# Altium PCB 330 下灯位.PcbDoc (part 2 of 5)
Units mm, origin at the board's own origin, x right, y up, seen from the top; angles counter-clockwise.
Board outline 301.8 x 92.3 mm, 2 copper layers (Top, Bottom), stack 0.323 mm thick; 298 components, 203 nets, 2190 pads, 758 vias.
Unrouted connection lines stored in the file: 36.
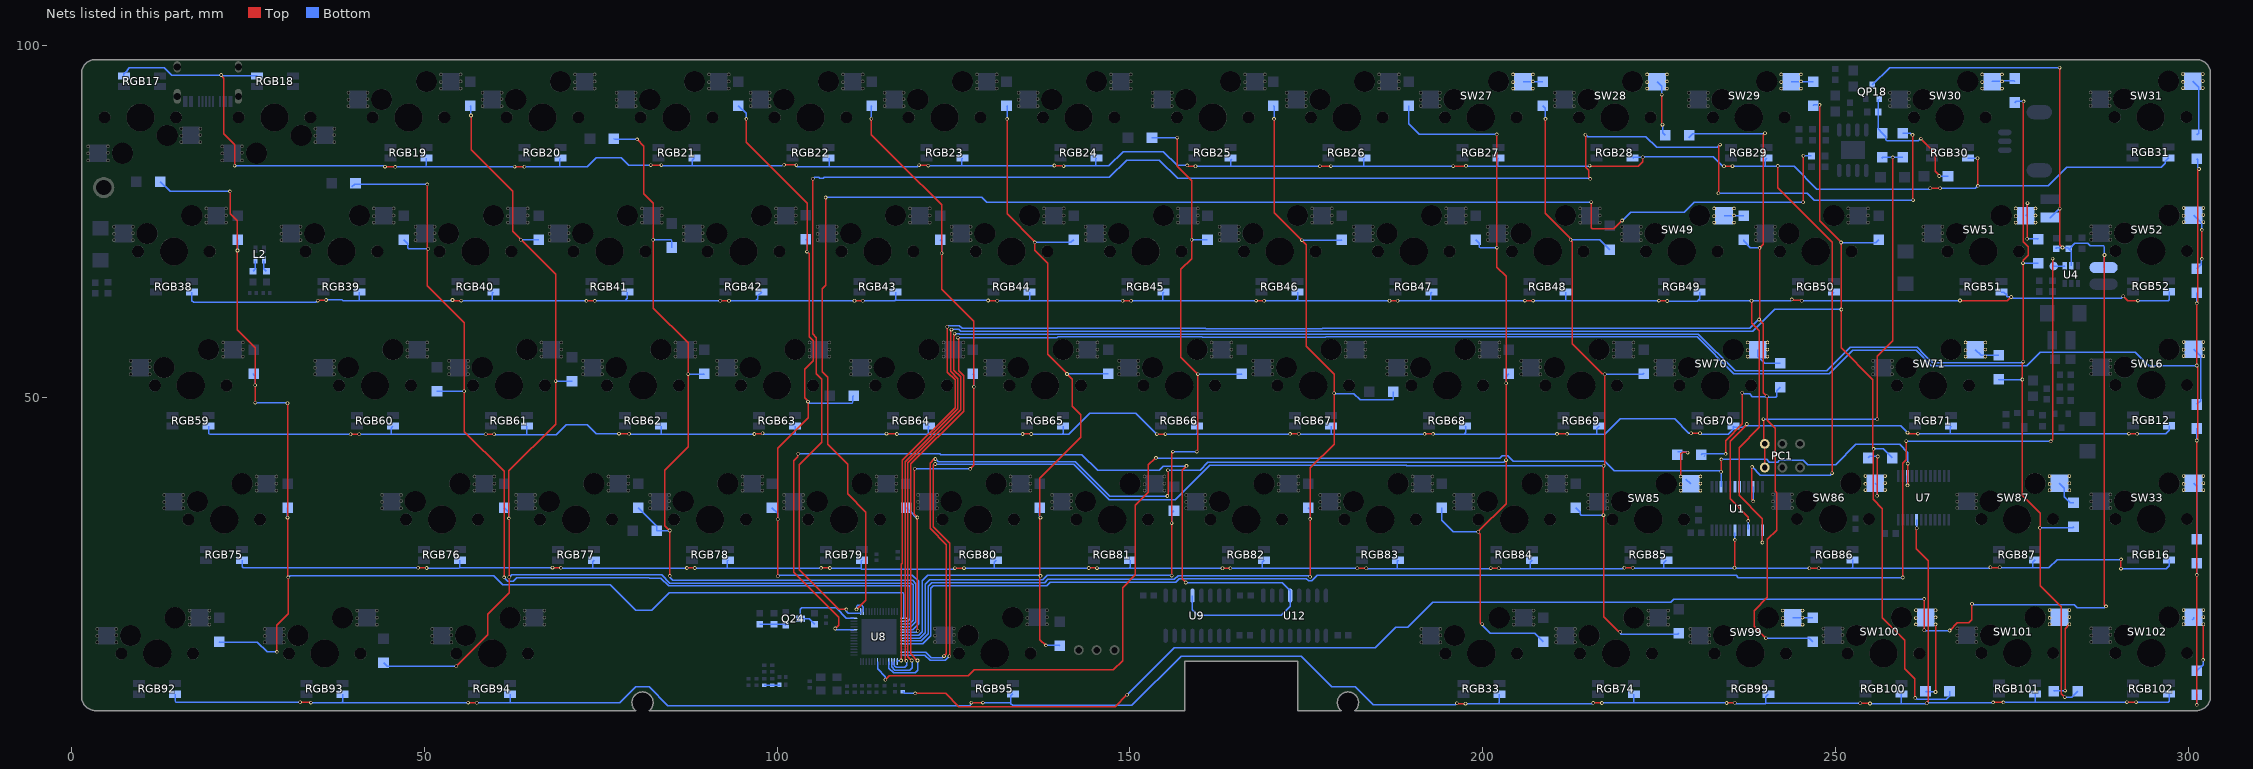
[diagram p2: the nets of this part, all layers, seen from the top]

## Via types
v1: diameter 0.508, hole 0.305, Top to Bottom, tented both sides, 758 vias

## Nets (pads, with @x,y where several pads share a name; then routed paths per layer and width w, separated by ;. In a path a pad name is that pad's centre, name@x,y a point inside that pad or via, vN(x,y) a via of type N, cw(c..) or ccw(c..) an arc to the next point about the centre after c; other vN are vias at no path point) (continued)
$$$29522: D62.1 SW27.1 SW27.10 SW27.11 SW27.14 SW27.15 SW27.16 SW27.17 | length 2.8
  Bottom w0.2: SW27.1@205.732,94.814 208.509,94.814 D62.1@208.511,94.816
$$$29555: D65.1 SW99.1 SW99.10 SW99.11 SW99.14 SW99.15 SW99.16 SW99.17 | length 8.7
  Bottom w0.2: SW99.1@243.957,18.814 243.958,18.813 SW99.16@245.357,18.813 ; SW99.16@245.357,18.813 D65.1@246.815,18.813 ; SW99.16@245.357,18.813 D65.1@246.815,18.813 ; SW99.16@245.357,18.813 D65.1@246.815,18.813 ; SW99.16@245.357,18.813 D65.1@246.815,18.813 ; SW99.16@245.357,18.813 D65.1@246.815,18.813
$$$29558: D66.1 SW85.1 SW85.10 SW85.11 SW85.14 SW85.15 SW85.16 SW85.17 | length 6.6
  Top w0.2: SW85.14@228.087,38.834 228.087,42.032 228.346,42.291 228.512,42.291 228.528,42.275 229.005,42.275 v1(229.064,42.216)
  Bottom w0.2: D66.1@227.7,42.32 228.96,42.32 v1(229.064,42.216) ; SW85.1@228.833,38.468 SW85.1@229.487,37.814
$$$29560: D64.1 SW70.1 SW70.10 SW70.11 SW70.14 SW70.15 SW70.16 SW70.17 | length 4.5
  Bottom w0.2: SW70.1@238.987,56.814 238.987,55.907 240.029,54.865 D64.1@242.194,54.865
$$$29563: D67.1 SW49.1 SW49.10 SW49.11 SW49.14 SW49.15 SW49.16 SW49.17 | length 2.8
  Bottom w0.2: SW49.1@234.232,75.814 D67.1@237.002,75.815
$$$29587: 
$$$29589: D68.1 SW28.1 SW28.10 SW28.11 SW28.14 SW28.15 SW28.16 SW28.17 | length 8.4
  Top w0.2: v1(225.398,92.976) 225.425,92.949 225.425,88.392
  Bottom w0.2: SW28.1@224.732,94.814 225.398,94.148 v1(225.398,92.976) ; v1(225.508,88.719) 225.508,87.576 D68.1@225.889,87.195
$$$29611: D70.1 SW51.1 SW51.10 SW51.11 SW51.14 SW51.15 SW51.16 SW51.17 | length 8.6
  Top w0.2: v1(277.195,72.529) 277.218,72.552 277.218,77.574 v1(277.241,77.597)
  Bottom w0.2: SW51.1@276.982,75.814 277.241,76.073 v1(277.241,77.597) ; v1(277.195,72.529) 278.724,72.529 D70.1@278.765,72.488
$$$29621: D71.1 SW52.1 SW52.10 SW52.11 SW52.14 SW52.15 SW52.16 SW52.17 | length 8.4
  Top w0.2: v1(301.97,69.676) 301.948,69.699 301.948,73.763 v1(301.97,73.786)
  Bottom w0.2: SW52.1@300.786,75.875 301.936,74.725 301.936,73.82 v1(301.97,73.786) ; D71.1@301.244,68.297 301.894,68.947 301.894,69.516 301.97,69.593 v1(301.97,69.676)
$$$29673: 
$$$29675: D73.1 SW29.1 SW29.10 SW29.11 SW29.14 SW29.15 SW29.16 SW29.17 | length 3.1
  Bottom w0.2: SW29.1@243.732,94.814 SW29.1@243.732,94.814 D73.1@246.85,94.815
$$$29677: 
$$$29679: D74.1 SW30.1 SW30.10 SW30.11 SW30.14 SW30.15 SW30.16 SW30.17 | length 3.3
  Bottom w0.2: SW30.1@272.232,94.814 272.252,94.834 273.542,94.834 273.632,94.924 273.665,94.892 273.866,94.892 273.899,94.924 275.334,94.924 D74.1@275.443,94.816
$$$29684: D75.1 SW31.1 SW31.10 SW31.11 SW31.14 SW31.15 SW31.16 SW31.17 | length 8.1
  Bottom w0.2: SW31.1@300.692,94.864 301.52,94.036 301.52,87.525 D75.1@301.244,87.249
$$$29726: D81.1 SW100.1 SW100.10 SW100.11 SW100.14 SW100.15 SW100.16 SW100.17 | length 11
  Top w0.2: v1(264.206,8.287) 264.206,8.301 264.223,8.318 SW100.15@264.223,17.868
  Bottom w0.2: D81.1@262.792,8.382 262.887,8.287 v1(264.206,8.287)
$$$29728: D82.1 SW86.1 SW86.10 SW86.11 SW86.14 SW86.15 SW86.16 SW86.17 | length 8.9
  Top w0.2: v1(255.92,36.114) 255.971,36.166 255.971,41.62 v1(256.023,41.671)
  Bottom w0.2: D82.1@254.693,41.461 254.904,41.671 v1(256.023,41.671) ; SW86.1@255.671,37.875 255.92,37.626 v1(255.92,36.114)
$$$29748: D84.1 SW101.1 SW101.10 SW101.11 SW101.14 SW101.15 SW101.16 SW101.17 | length 11.3
  Top w0.2: v1(282.573,8.484) 282.57,8.487 282.57,17.279 SW101.15@283.186,17.895
  Bottom w0.2: D84.1@280.953,8.382 281.039,8.468 282.557,8.468 v1(282.573,8.484)
$$$29755: D85.1 SW87.1 SW87.10 SW87.11 SW87.14 SW87.15 SW87.16 SW87.17 | length 3.9
  Bottom w0.2: SW87.1@281.775,37.859 282.448,37.186 282.448,35.941 283.3,35.089 D85.1@283.77,35.089
$$$29760: D83.1 SW71.1 SW71.10 SW71.11 SW71.14 SW71.15 SW71.16 SW71.17 | length 3.6
  Bottom w0.2: SW71.1@269.862,56.814 270.669,56.007 D83.1@273.177,56.007
$$$29788: D88.1 SW16.1 SW16.10 SW16.11 SW16.14 SW16.15 SW16.16 SW16.17 | length 8.5
  Bottom w0.2: SW16.1@300.786,56.875 301.783,55.878 301.783,49.581 D88.1@301.244,49.041
$$$29790: D87.1 SW33.1 SW33.10 SW33.11 SW33.14 SW33.15 SW33.16 SW33.17 | length 8.1
  Bottom w0.2: SW33.1@300.786,37.875 301.23,37.431 301.23,29.957 D87.1@301.244,29.943
$$$29792: D86.1 SW102.1 SW102.10 SW102.11 SW102.14 SW102.15 SW102.16 SW102.17 | length 7.4
  Top w0.2: v1(302.133,12.827) 302.133,17.842 SW102.15@302.186,17.895
  Bottom w0.2: SW102.1@300.615,18.531 300.786,18.702 SW102.1@300.786,18.875 ; D86.1@301.244,11.274 302.133,12.163 v1(302.133,12.827)
$$$29832: L2.3 R100.1 R115.1 | length 1.6
  Bottom w0.2: R100.1@25.7,67.949 26.047,68.296 L2.3@26.047,69.409
$$$29834: L2.2 R101.1 R116.1 | length 1.6
  Bottom w0.2: L2.2@27.247,69.409 27.247,68.29 R101.1@27.588,67.949
$$$30765: C20.2 C26.2 C31.1 | length 2.2
  Bottom w0.2: C26.2@98.166,9.261 100.264,9.261 C31.1@100.332,9.329
$$$31051: Q24.1 R56.2 R87.1 | length 3.8
  Bottom w0.2: R87.1@97.536,17.899 101.062,17.899 Q24.1@101.244,17.717
$$$31397: D11.1 D72.1 QP18.1 R4.1 | length 19
  Top w0.2: v1(262.132,86.73) 264.178,84.684 264.178,82.071 v1@264.736,81.513
  Bottom w0.2: QP18.1@256.207,92.343 256.072,92.209 R4.1@256.072,90.53 256.072,88.098 D72.1@256.667,87.503 257.175,86.995 257.175,86.604 257.355,86.424 261.783,86.424 262.089,86.73 v1(262.132,86.73) ; v1(264.734,81.432) 265.943,81.432 D11.1@265.979,81.396
BAT_VCC: C23.2 C28.2 CA2.1 L1.1 QP18.3 R2.1 U4.5 | length 303.9
  Top w0.2: v1(119.583,8.087) 123.866,8.087 125.73,6.223 147.916,6.223 149.585,7.892 v1(149.6,7.892) ; v1(262.614,17.049) v1@262.614,21.477 ; v1(266.197,17) 267.285,18.088 268.913,18.088 269.377,18.552 v1(269.377,20.798) ; v1(281.794,96.798) 281.794,71.71 v1(282.211,71.293) ; v1@288.137,70.436 288.137,20.687 288.381,20.443 v1(288.381,20.416)
  Bottom w0.2: R2.1@117.8,8.318 117.85,8.318 118.08,8.087 v1(119.583,8.087) ; v1(149.6,7.892) 156.263,14.556 184.751,14.556 187.692,17.497 189.386,17.497 192.916,21.027 226.64,21.027 227.076,21.463 262.6,21.463 v1(262.614,21.477) ; QP18.3@255.257,94.343 257.712,96.798 v1(281.794,96.798) ; v1(262.614,17.049) 262.663,17 v1(266.197,17) ; v1(269.377,20.798) 269.461,20.798 269.584,20.675 283.871,20.675 284.327,20.219 288.11,20.219 288.307,20.416 v1(288.381,20.416) ; CA2.1@280.416,75.535 280.438,75.513 281.728,76.803 v1(281.816,76.803) ; C23.2@281.305,71.132 281.305,71.166 281.221,71.249 282.965,71.249 C28.2@283.083,71.132 ; U4.5@283.464,68.707 283.464,70.751 C28.2@283.083,71.132 ; L1.1@288.036,68.453 288.146,68.563 288.146,71.402 288.029,71.519 286.11,71.519 285.752,71.877 283.963,71.877 283.218,71.132 C28.2@283.083,71.132
  other v1: 288.163,70.231
BK: U8.38 U9.4 U12.4 | length 138.1
  Top w0.2: v1(102.997,42.064) 102.938,42.005 102.938,41.633 102.737,41.432 102.337,41.032 102.337,25.295 108.75,18.881 108.75,17.77 108.263,17.283 v1(108.228,17.283) ; v1(157.932,23.811) 157.932,23.849 157.437,24.343 157.437,39.748 v1(158.03,40.342)
  Bottom w0.2: v1(102.997,42.064) 123.069,42.064 123.223,41.91 143.212,41.91 145.434,39.688 154.173,39.688 154.76,40.276 157.964,40.276 v1(158.03,40.342) ; v1(108.228,17.283) 108.228,17.246 108.346,17.129 110.377,17.129 U8.38@110.877,17.129 ; v1(157.932,23.811) 158.025,23.811 158.056,23.78 171.578,23.78 172.72,22.638 172.72,20.451 171.43,19.161 159.649,19.161 158.877,19.934 U9.4@158.877,21.956
BOOSTER_EN: ICE.1 U4.4 U8.10 | length 218.7
  Top w0.2: v1(259.559,24.511) 259.559,40.734 260.035,41.21 260.035,43.792 260.062,43.819 v1(260.062,43.845) ; v1(280.539,43.809) 280.539,43.822 280.797,44.081 v1(280.797,69.723)
  Bottom w0.2: U8.10@117.977,15.129 120.666,15.129 121.793,16.256 121.793,23.017 122.105,23.329 138.232,23.329 138.737,23.835 156.484,23.835 157.014,24.365 175.023,24.365 175.329,24.059 175.788,24.059 176.53,24.802 235.929,24.802 236.22,24.511 v1(259.559,24.511) ; v1(260.062,43.845) 260.098,43.809 v1(280.539,43.809) ; v1(280.797,69.723) 280.797,68.841 ICE.1@280.977,68.661 282.468,68.661 U4.4@282.514,68.707
BT: D9.2 D72.2 PC1.1 PC1.4 | length 64.2
  Top w0.2: v1(239.811,46.977) 239.83,46.958 PC1.4@239.83,43.44 ; PC1.1@240.001,40.113 PC1.4@240.001,43.463 ; v1(255.946,46.952) 255.946,55.852 258.142,58.048 v1(258.142,84.074)
  Bottom w0.2: v1(239.811,46.977) 255.921,46.977 v1(255.946,46.952) ; D72.2@256.6,83.949 256.667,84.016 D72.2@256.667,84.103 256.696,84.074 v1(258.142,84.074) D9.2@259.588,84.074
BT_MODE: D9.1 U8.43 | length 253.6
  Top w0.2: v1(105.043,81.037) 105.043,59.041 105.56,58.524 105.56,53.386 106.307,52.639 106.307,43.696 103.137,40.526 103.137,34.107 103.155,34.089 103.155,25.609 108.759,20.004 v1(109.817,20.004) ; v1(214.573,87.285) 214.612,87.245 214.612,82.685 215.08,82.217 215.08,81.295 215.265,81.109 v1(215.265,81.026) ; v1@233.462,79.078 233.462,85.62 233.673,85.831 v1(233.673,85.892) ; v1(260.946,87.267) 260.986,87.227 260.986,78.056 v1(261.026,78.016)
  Bottom w0.2: v1(105.043,81.037) 105.105,81.037 105.314,81.246 105.91,81.246 106.051,81.105 106.51,81.105 106.651,81.246 147.087,81.246 149.534,83.693 154.173,83.693 156.767,81.098 v1@215.173,81.098 ; v1@109.817,20.1 109.82,20.097 109.82,19.72 110.09,19.45 111.827,19.45 U8.43@111.827,19.679 ; v1(214.573,87.285) 214.652,87.285 214.937,87 223.151,87 224.671,85.479 233.244,85.479 233.656,85.892 v1(233.673,85.892) ; v1(233.426,78.994) 246.035,78.994 247.008,78.021 261.021,78.021 v1(261.026,78.016) ; D9.1@259.588,87.474 260.655,87.474 260.863,87.267 v1(260.946,87.267)
CD0: D2.2 D3.2 D5.2 D7.2 D12.2 U8.1 | length 190.1
  Top w0.2: v1(22.422,79.254) 22.445,79.231 22.445,76.107 23.495,75.057 v1(23.495,70.866) 23.495,59.615 26.001,57.108 v1(26.001,51.768) ; v1@26.005,51.756 26.015,51.746 v1(26.015,49.305) ; v1(29.083,13.97) 29.083,17.78 30.702,19.399 v1(30.702,24.527) 30.59,24.639 v1(30.59,49.227)
  Bottom w0.2: D5.2@12.544,80.645 13.935,79.254 v1(22.422,79.254) ; D2.2@20.884,15.415 20.948,15.351 26.305,15.351 27.686,13.97 v1(29.083,13.97) ; v1(23.495,70.866) 23.504,70.875 D7.2@23.504,72.41 ; D12.2@25.793,53.415 25.704,53.326 26.001,53.028 v1(26.001,51.768) ; v1(26.015,49.305) 30.512,49.305 v1(30.59,49.227) ; v1(30.584,33.011) 30.584,34.378 D3.2@30.621,34.415 ; v1(30.702,24.527) 30.941,24.765 59.817,24.765 61.09,23.492 76.347,23.492 78.61,21.229 78.61,21.189 79.961,19.838 82.195,19.838 84.709,22.352 117.86,22.352 117.977,22.235 U8.1@117.977,18.729
CD1: D1.2 D13.2 D14.2 U8.2 | length 143.6
  Top w0.2: v1(50.399,80.249) 50.381,80.231 v1@50.381,71.12 ; v1(50.535,71.12) v1@50.381,71.12 ; v1(61.283,24.531) 61.283,39.555 55.637,45.201 55.637,50.927 55.637,60.631 50.381,65.886 v1@50.381,71.12
  Bottom w0.2: D1.2@39.727,79.884 40.091,80.249 v1(50.399,80.249) ; D13.2@47.061,72.417 47.625,71.854 47.625,71.237 47.742,71.12 v1(50.535,71.12) ; D14.2@51.778,50.9 51.805,50.927 v1(55.626,50.927) ; v1(61.283,24.531) 61.283,24.501 61.782,24.003 62.611,24.003 63.059,24.451 81.872,24.451 81.881,24.442 83.497,24.442 84.609,23.33 118.755,23.33 118.872,23.213 118.872,18.658 118.543,18.329 U8.2@117.977,18.329
CD2: D15.2 D16.2 D17.2 D18.2 D19.2 U8.3 | length 172.1
  Top w0.2: v1(54.512,11.936) 58.992,16.416 58.992,19.302 62.011,22.321 v1(62.011,24.557) 61.994,24.575 61.994,32.875 v1(61.976,32.893) 61.976,39.624 68.58,46.228 68.58,67.483 62.484,73.579 62.484,79.248 56.607,85.125 v1@56.607,90.067
  Bottom w0.2: D16.2@44.196,12.446 44.706,11.936 v1(54.512,11.936) ; D19.2@56.493,91.414 56.599,91.308 v1(56.599,90.006) ; D15.2@61.292,34.416 61.976,33.731 v1(61.976,32.893) ; v1(62.011,24.557) 62.077,24.557 62.404,24.884 83.62,24.884 84.774,23.73 119.027,23.73 119.272,23.485 119.272,18.424 118.777,17.929 U8.3@117.977,17.929 ; v1(63.651,72.392) 66.158,72.392 D18.2@66.182,72.416 ; v1(68.586,52.36) 70.912,52.36 D17.2@70.918,52.365
CD3: D21.2 D22.2 D23.2 D24.2 D25.2 U8.4 | length 125
  Top w0.2: v1(80.137,86.614) 81.119,85.632 81.119,78.901 82.462,77.558 82.462,62.699 87.376,57.785 87.376,43.053 84.067,39.744 84.067,31.875 v1(84.768,31.174) v1(84.768,24.739)
  Bottom w0.2: D25.2@76.863,86.725 76.975,86.614 v1(80.137,86.614) ; D21.2@80.287,34.413 82.931,31.77 D22.2@82.931,31.115 84.709,31.115 v1(84.768,31.174) ; v1(82.423,72.39) 84.951,72.39 85.068,72.273 D24.2@85.068,71.296 ; v1(84.768,24.739) 84.827,24.681 84.827,24.472 85.169,24.13 119.193,24.13 119.672,23.651 119.672,18.258 118.943,17.529 U8.4@117.977,17.529 ; v1(87.394,53.357) 89.598,53.357 89.615,53.34 D23.2@89.692,53.417
CD4: D27.2 D28.2 D29.2 D30.2 U8.5 | length 113.9
  Top w0.2: v1(95.631,89.535) 95.631,86.233 104.287,77.577 104.287,70.994 104.28,70.987 104.28,70.782 v1(104.221,70.723) 104.552,70.392 104.552,58.647 105.137,58.062 105.137,55.226 103.917,54.006 103.917,51.258 103.917,49.979 104.236,49.66 v1@104.236,49.431 ; v1@100.076,32.733 100.085,32.724 100.085,24.711 v1(100.094,24.702) ; v1(100.076,32.766) 100.076,42.827 104.39,47.141 104.39,49.44 v1(104.372,49.458)
  Bottom w0.2: D30.2@94.514,91.414 95.631,90.297 v1(95.631,89.535) ; D27.2@99.256,34.412 100.076,33.592 v1(100.076,32.766) ; v1(100.094,24.702) 100.14,24.702 100.303,24.865 119.178,24.865 120.072,23.971 120.072,17.973 119.228,17.129 U8.5@117.977,17.129 ; D29.2@104.031,72.465 104.296,72.199 104.296,70.869 104.221,70.793 v1(104.221,70.723) ; v1(104.372,49.458) 104.372,49.375 104.489,49.258 104.489,49.242 110.609,49.242 110.726,49.359 110.726,50.176 D28.2@110.842,50.292
CD5: D32.2 D33.2 D34.2 D35.2 U8.6 | length 97.1
  Top w0.2: v1@113.365,89.695 113.365,87.295 117.602,83.058 123.317,77.343 v1(123.317,70.485) 123.317,65.405 127.889,60.833 127.889,40.435 v1(127.372,39.918) ; v1(119.504,39.929) 119.437,39.862 119.437,33.471 v1(119.888,33.02) 119.888,17.011 v1(119.928,16.971)
  Bottom w0.2: v1(113.36,89.543) 113.36,91.344 D35.2@113.434,91.417 ; U8.6@117.977,16.729 118.477,16.729 119.687,16.729 v1(119.928,16.971) ; D32.2@118.299,34.418 119.049,33.668 119.638,33.079 119.829,33.079 v1(119.888,33.02) ; v1(119.504,39.929) 119.53,39.954 127.336,39.954 v1(127.372,39.918) ; D34.2@123.118,72.396 123.317,72.197 v1(123.317,70.485) ; D33.2@127.755,53.417 127.889,53.283 v1(127.889,51.562)
CD6: D37.2 D38.2 D39.2 D40.2 D41.2 U8.7 | length 125.9
  Top w0.2: v1(132.588,89.535) 132.588,76.049 v1@136.525,72.112 ; v1(136.525,72.02) 136.514,72.009 136.514,70.906 138.381,69.039 138.381,56.143 v1@141.11,53.413 ; v1@137.224,24.712 137.224,15.709 138.041,14.893 v1(138.092,14.893) ; v1(137.333,24.745) 137.308,24.745 137.191,24.862 v1@137.191,33.008 ; v1(137.333,33.008) v1@137.191,33.008 ; v1(141.083,53.365) 141.849,52.599 141.849,48.759 143.002,47.606 143.002,44.367 137.191,38.556 v1@137.191,33.008
  Bottom w0.2: U8.7@117.977,16.329 120.07,16.329 120.593,16.852 120.593,24.084 121.331,24.822 137.114,24.822 137.191,24.745 v1(137.333,24.745) ; D41.2@132.514,91.412 132.588,91.338 v1(132.588,89.535) ; v1(136.525,72.02) 141.621,72.02 D40.2@142.017,72.417 ; D38.2@137.219,34.416 137.187,34.384 137.187,33.237 137.333,33.091 v1(137.333,33.008) ; v1(138.092,14.893) 140.005,14.893 140.06,14.838 D37.2@140.081,14.859 ; v1(141.083,53.365) 146.868,53.365 D39.2@146.916,53.412
CD7: D43.2 D44.2 D46.2 D47.2 U8.8 | length 127.7
  Top w0.2: v1(155.91,32.224) 155.951,32.264 155.951,42.133 156.091,42.274 v1(156.091,42.357) ; v1@155.92,32.214 155.92,24.798 v1(155.929,24.789) ; v1(156.718,86.868) 156.718,82.804 158.74,80.782 158.74,72.39 158.74,69.725 157.21,68.195 157.21,55.758 v1@159.628,53.34 ; v1(159.481,42.357) 159.481,42.461 159.639,42.619 159.639,49.301 ; 159.639,49.301 v1(159.639,53.34)
  Bottom w0.2: U8.8@117.977,15.929 120.236,15.929 120.993,16.686 120.993,23.547 121.637,24.191 137.668,24.191 138.313,24.836 155.882,24.836 v1(155.929,24.789) ; D44.2@153.133,86.868 v1(156.718,86.868) ; v1(155.91,32.224) 155.91,33.658 D46.2@156.254,34.001 ; v1(156.091,42.357) v1(159.481,42.357) ; v1(158.75,72.39) 160.975,72.39 D43.2@160.999,72.414 ; v1(159.639,53.34) 165.761,53.34 D47.2@165.836,53.415
CD8: D48.2 D49.2 D50.2 D51.2 U8.9 | length 154.7
  Top w0.2: v1@170.448,89.772 170.448,76.247 175.006,71.689 175.006,57.277 178.943,53.34 178.943,43.434 175.558,40.049 v1(175.558,24.613)
  Bottom w0.2: U8.9@117.977,15.529 120.401,15.529 121.393,16.521 121.393,23.305 121.879,23.791 137.912,23.791 138.356,24.235 156.318,24.235 156.849,24.765 175.323,24.765 175.475,24.613 v1(175.558,24.613) ; D51.2@170.353,91.416 170.434,91.334 v1(170.434,89.535) ; v1(174.381,72.353) 179.994,72.353 D48.2@180.057,72.416 ; D49.2@175.272,34.415 175.552,34.134 v1(175.552,32.823) ; v1(178.948,50.633) 178.997,50.584 181.733,50.584 182.627,49.691 187.241,49.691 187.358,49.808 D50.2@187.358,50.841
CD9: D53.2 D54.2 D55.2 D56.2 D76.2 U8.13 | length 232.8
  Top w0.2: v1(122.424,41.316) 122.3,41.316 121.686,40.702 121.686,31.476 124.001,29.161 124.001,13.734 v1(123.647,13.379) ; v1(155.321,36.068) 155.321,36.151 155.437,36.267 155.437,39.681 v1(155.397,39.722) ; v1@199.393,31.066 203.324,34.997 203.324,41.149 v1(203.32,41.153) ; 199.517,30.765 199.656,30.626 199.656,18.08 199.72,18.015 199.746,18.015 199.859,17.902 v1(199.943,17.902) ; v1(202.017,87.331) 202.017,68.493 203.324,67.186 v1@203.324,41.157
  Bottom w0.2: U8.13@117.977,13.929 121.089,13.929 121.856,13.162 123.376,13.162 123.593,13.379 v1(123.647,13.379) ; v1(122.424,41.316) 122.485,41.316 122.846,40.955 142.237,40.955 147.177,36.014 155.267,36.014 v1(155.321,36.068) ; v1(155.397,39.722) 155.42,39.745 159.95,39.745 161.036,40.831 202.998,40.831 v1(203.32,41.153) ; D56.2@189.51,91.415 189.51,88.874 191.053,87.331 v1(202.017,87.331) ; D54.2@194.206,34.415 194.206,32.616 195.824,30.998 v1(199.393,30.998) ; D53.2@199.033,72.413 199.517,71.929 199.517,71.364 199.634,71.247 201.994,71.247 v1(202.033,71.286) ; v1(199.943,17.902) 199.943,17.819 200.056,17.705 200.056,17.677 201.118,16.614 207.408,16.614 D76.2@208.606,15.416 ; v1(203.326,52.062) 203.326,53.008 D55.2@203.734,53.417
CD10: D58.2 D59.2 D60.2 D61.2 D62.2 U8.14 | length 238.9
  Top w0.2: v1(122.406,40.608) 122.342,40.608 122.137,40.403 122.137,31.675 124.46,29.352 124.46,13.427 124.41,13.377 v1(124.41,13.36) ; v1(208.915,89.535) 208.915,76.126 v1@212.617,72.424 ; v1(212.471,72.39) 212.471,72.332 212.684,72.119 212.684,57.64 216.959,53.365 217.282,53.365 v1(217.312,53.334) 217.312,40.516 v1(217.161,40.365) ; v1@217.137,33.366 217.137,40.16 217.169,40.192 v1@217.169,40.372 ; v1(217.142,33.366) 217.196,33.312 217.196,18.924 218.214,17.905 219.233,16.886 219.446,16.886 v1(219.505,16.827)
  Bottom w0.2: U8.14@117.977,13.529 120.923,13.529 121.69,12.762 123.813,12.762 v1(124.41,13.36) ; v1(122.406,40.608) 122.439,40.608 122.466,40.58 122.684,40.58 122.71,40.555 142.071,40.555 147.112,35.514 156.441,35.514 161.358,40.431 189.185,40.431 189.251,40.365 v1(217.161,40.365) ; D62.2@208.511,91.416 208.915,91.012 v1(208.915,89.535) ; v1(212.471,72.39) 216.638,72.39 D61.2@218.027,71.001 ; D60.2@213.231,34.41 213.85,33.792 213.85,33.504 213.988,33.366 v1(217.142,33.366) ; v1(217.312,53.334) 222.685,53.334 222.815,53.464 D58.2@222.869,53.41 ; v1(219.505,16.827) 219.564,16.768 219.564,16.555 219.635,16.484 227.692,16.484 D59.2@227.819,16.612
CD11: D64.2 D65.2 D66.2 D67.2 D68.2 U8.15 | length 283.3
  Top w0.2: v1(117.579,12.75) 117.581,12.752 117.581,26.374 117.732,26.525 117.732,41.12 125.217,48.605 125.217,52.528 124.137,53.608 124.137,60.037 v1(124.111,60.063) ; v1(234.442,42.037) 234.442,43.92 236.814,46.292 v1(236.814,50.702) ; v1(239.268,71.247) 239.792,71.771 239.792,87.231 240.03,87.469 v1(240.03,87.503) ; v1@239.282,71.247 239.282,61.172 v1(239.204,61.094) 239.803,60.495 239.803,50.68 v1(240.28,50.203) 240.365,50.118 240.365,46.782 240.919,46.228 ; v1(240.154,15.899) 239.348,16.705 238.476,17.577 238.476,19.789 240.373,21.686 240.373,29.934 241.672,31.233 241.672,34.117 241.721,34.167 241.721,36.523 241.473,36.771 241.473,45.669 240.917,46.224
  Bottom w0.2: U8.15@117.027,12.579 117.027,12.75 v1(117.579,12.75) ; v1(124.111,60.063) 124.126,60.078 124.195,60.078 124.331,60.214 125.841,60.214 126.238,59.817 160.767,59.817 160.776,59.808 177.278,59.808 177.287,59.817 237.883,59.817 239.161,61.094 v1(239.204,61.094) ; D68.2@229.206,86.868 229.772,87.434 239.759,87.434 239.769,87.444 239.971,87.444 v1(240.03,87.503) ; D66.2@231.013,41.91 231.14,42.037 v1(234.442,42.037) ; D66.2@231.407,41.786 D66.2@231.495,41.698 ; v1(236.814,50.702) 236.898,50.702 237.061,50.538 237.879,50.538 238.252,50.165 240.325,50.165 240.363,50.203 240.505,50.062 241.591,50.062 241.709,50.179 241.709,50.98 D64.2@242.194,51.465 ; D67.2@237.002,72.415 237.002,72.22 237.975,71.247 v1(239.268,71.247) ; v1(240.154,15.899) 246.329,15.899 D65.2@246.815,15.413
CD12: D6.2 D73.2 D81.2 D82.2 U8.16 | length 286.5
  Top w0.2: v1(118.315,12.696) 118.132,12.879 118.132,40.954 125.617,48.439 125.617,52.705 124.593,53.729 124.593,59.5 124.712,59.619 v1(124.712,59.66) ; v1(247.781,91.514) 247.763,91.495 247.763,75.094 v1@250.847,72.009 ; v1@250.847,62.51 v1@250.847,72 ; v1(250.86,62.51) 250.86,57.058 255.341,52.577 255.341,42.932 255.439,42.833 v1(255.439,42.75) ; v1@255.366,42.75 255.366,35.592 256.667,34.291 256.667,18.817 259.878,15.605 259.878,11.597 261.284,10.191 261.284,7.509 v1(261.343,7.45)
  Bottom w0.2: U8.16@116.627,12.579 116.627,12.013 116.861,11.779 118.069,11.779 118.378,12.088 118.378,12.55 118.315,12.612 v1(118.315,12.696) ; v1(124.712,59.66) 124.754,59.702 125.758,59.702 126.044,59.417 160.602,59.417 160.61,59.408 177.444,59.408 177.452,59.417 238.31,59.417 241.411,62.518 250.852,62.518 v1(250.86,62.51) ; D73.2@246.85,91.415 246.949,91.514 v1(247.781,91.514) ; v1(250.823,72) 255.757,72 D6.2@256.171,72.414 ; v1(255.439,42.75) 256.804,42.75 257.443,42.111 D82.2@258.093,41.461 ; v1(261.343,7.45) 261.426,7.45 261.597,7.279 265.724,7.279 266.192,7.747 D81.2@266.192,8.382
CD13: D70.2 D74.2 D83.2 D84.2 D85.2 U8.17 | length 312.6
  Top w0.2: v1(119.075,12.75) 119.045,12.75 118.532,13.262 118.532,40.788 126.017,48.273 126.017,52.947 125.039,53.925 125.039,58.748 125.088,58.797 125.088,59.025 v1(125.147,59.084) ; v1(276.7,92.008) 276.641,91.949 276.641,72.101 277.368,71.374 277.368,70.231 276.636,69.499 276.636,54.961 276.515,54.84 276.515,36.159 279.019,33.655 279.019,23.368 282.019,20.368 282.019,8.066 v1(282.523,7.562)
  Bottom w0.2: U8.17@116.227,12.579 116.227,11.848 116.696,11.379 118.772,11.379 119.15,11.757 119.15,12.675 v1(119.075,12.75) ; v1(125.147,59.084) 125.811,59.084 125.88,59.014 160.438,59.014 160.445,59.008 177.609,59.008 177.616,59.014 230.59,59.014 235.792,53.812 248.757,53.812 252.087,57.142 261.608,57.142 262.636,56.114 263.791,54.96 272.3,54.96 272.303,54.957 276.396,54.957 276.552,55.114 v1(276.636,55.114) ; D83.2@273.177,52.607 273.202,52.582 v1(276.525,52.582) ; D74.2@275.463,91.85 275.621,92.008 v1(276.7,92.008) ; v1(276.606,69.088) D70.2@278.765,69.088 ; v1(279.011,31.57) 283.651,31.57 D85.2@283.77,31.689 ; v1(282.523,7.562) 283.533,7.562 D84.2@284.353,8.382
CD14: D71.2 D75.2 D86.2 D87.2 D88.2 U8.18 | length 322.1
  Top w0.2: v1(119.892,12.75) 119.858,12.75 118.932,13.676 118.932,40.622 126.417,48.108 126.417,53.112 125.73,53.799 v1@125.73,58.401 ; v1(301.244,6.464) v1(301.244,24.892) 301.244,44.016 301.416,44.188 301.416,54.296 301.244,54.468 301.244,63.456 301.416,63.629 301.416,82.306 301.533,82.423 v1(301.57,82.423)
  Bottom w0.2: U8.18@115.827,12.579 115.827,11.682 116.53,10.979 119.541,10.979 119.904,11.342 119.904,12.738 v1(119.892,12.75) ; v1(125.593,58.518) 139.685,58.518 139.781,58.614 160.273,58.614 160.279,58.608 177.775,58.608 177.781,58.614 230.425,58.614 235.627,53.412 249.119,53.412 252.449,56.742 261.443,56.742 263.625,54.56 272.134,54.56 272.137,54.557 277.169,54.557 279.06,56.447 292.549,56.447 294.43,54.566 v1(301.229,54.566) ; v1(301.244,6.464) D86.2@301.244,7.874 ; v1(301.244,24.892) D87.2@301.244,26.543 ; v1(301.244,43.933) D88.2@301.244,45.641 ; v1(301.244,63.373) D71.2@301.244,64.897 ; D75.2@301.244,83.849 301.371,83.722 301.371,82.706 301.57,82.506 v1(301.57,82.423)
CHRG_IN: Q24.3 R54.1 U8.42 | length 12
  Bottom w0.2: R54.1@105.294,17.899 104.524,18.669 Q24.3@103.276,18.669 103.276,20.015 103.465,20.204 108.341,20.204 109.816,18.729 U8.42@110.877,18.729
CHRG_STATE: R21.2 U8.44 | length 215.8
  Top w0.2: v1(106.862,78.385) 106.862,65.968 106.36,65.466 106.36,53.717 107.155,52.922 107.155,43.416 109.987,40.584 109.987,36.356 112.562,33.781 112.562,21.314 v1(111.251,20.005) ; v1(215.41,77.733) 215.41,74.078 215.528,73.961 218.602,73.961 219.761,75.12 v1(219.775,75.12) ; v1(245.44,77.718) 245.44,84.268 v1(245.472,84.3)
  Bottom w0.2: v1(106.862,78.385) 129.025,78.385 129.677,77.733 v1(215.41,77.733) ; v1(111.251,20.005) 111.251,20.065 111.258,20.072 111.258,20.444 111.375,20.561 111.965,20.561 112.227,20.298 U8.44@112.227,19.679 ; v1(219.775,75.12) 220.982,76.327 228.6,76.327 229.991,77.718 v1(245.44,77.718) ; v1(245.472,84.3) 246.586,84.3 R21.2@246.618,84.268
D+: 
D-: 
DB0: U1.7
DB1: RGB17.3 RGB18.3 RGB19.3 RGB20.3 RGB21.3 RGB22.3 RGB23.3 RGB24.3 RGB25.3 RGB26.3 RGB27.3 RGB28.3 RGB29.3 RGB30.3 RGB31.3 U1.10 | length 399.9
  Top w0.2: v1(21.202,95.754) 21.202,95.683 21.563,95.323 21.563,87.403 23.083,85.883 v1(23.083,82.907) ; v1(44.408,82.76) 44.44,82.728 v1(45.859,82.728) ; v1(62.787,82.756) 64.155,82.756 v1(64.166,82.745) ; v1(82.076,82.973) 83.588,82.973 v1(83.59,82.975) ; v1(100.983,83.027) 101.002,83.008 102.702,83.008 v1(102.726,82.985) ; v1(120.117,82.975) 120.167,82.925 121.392,82.925 v1(121.409,82.908) ; v1(139.299,82.915) 140.526,82.915 v1(140.604,82.837) ; v1(158.134,82.93) 158.25,82.814 v1(159.305,82.814) ; v1(176.932,82.804) 176.943,82.815 178.485,82.815 v1(178.496,82.827) ; v1(195.84,82.827) 195.865,82.802 197.577,82.802 v1(197.652,82.877) ; v1(215.175,82.906) 215.269,82.812 222.096,82.812 222.704,83.42 v1(222.704,84.088) ; v1(234.227,82.823) 234.231,82.828 235.427,82.828 v1(235.431,82.833) ; v1(238.213,40.201) 238.165,40.153 238.165,35.603 238.374,35.395 v1(238.374,35.312) ; v1(241.842,82.87) 241.852,82.86 241.852,79.741 249.555,72.038 249.555,71.788 249.593,71.75 249.593,69.839 249.555,69.802 v1(249.555,39.307) ; v1(263.456,79.689) 263.46,79.693 264.861,79.693 v1(264.865,79.697) ; v1(270.161,83.943) 270.161,80.092 v1(270.214,80.039)
  Bottom w0.2: RGB17.3@7.403,95.614 7.403,95.922 7.86,96.379 7.86,96.446 8.188,96.774 13.117,96.774 14.2,95.691 v1@21.202,95.691 ; v1(21.202,95.754) 21.286,95.754 21.38,95.659 26.239,95.659 RGB18.3@26.279,95.619 ; v1(23.083,82.907) 23.136,82.854 44.23,82.854 44.325,82.76 v1(44.408,82.76) ; v1(45.859,82.728) 62.76,82.728 v1(62.787,82.756) ; 50.165,82.804 50.282,82.921 RGB19.3@50.282,83.964 ; v1(64.166,82.745) 69.156,82.745 ; RGB20.3@69.282,83.964 69.156,83.838 69.156,82.745 ; v1(82.076,82.973) 78.952,82.973 77.924,84.001 74.327,84.001 73.071,82.745 69.156,82.745 ; v1(83.59,82.975) 83.696,82.87 87.875,82.87 87.879,82.873 ; RGB21.3@88.282,83.964 87.955,83.637 87.955,82.95 87.879,82.873 ; 100.746,82.873 87.879,82.873 ; 102.802,82.72 119.862,82.72 v1(120.117,82.975) ; RGB22.3@107.282,83.964 107.372,83.874 107.372,82.909 ; v1(121.409,82.908) 121.454,82.863 126.13,82.863 126.182,82.915 ; RGB23.3@126.282,83.964 126.182,83.864 126.182,82.915 ; v1(139.299,82.915) 126.182,82.915 ; v1(140.604,82.837) 140.617,82.85 145.165,82.85 146.995,82.85 149.037,84.893 154.75,84.893 156.713,82.93 v1(158.134,82.93) ; 145.165,82.885 145.165,83.847 RGB24.3@145.282,83.964 ; v1(159.305,82.814) 159.316,82.804 164.322,82.804 ; RGB25.3@164.466,83.78 164.322,83.636 164.322,82.804 ; v1(176.932,82.804) 164.322,82.804 ; v1(178.496,82.827) 178.544,82.779 183.165,82.779 ; RGB26.3@183.282,83.964 183.165,83.847 183.165,82.779 ; v1(195.84,82.827) 195.793,82.779 183.165,82.779 ; v1(197.652,82.877) 197.726,82.803 202.165,82.803 215.072,82.803 v1(215.175,82.906) ; 202.165,82.804 202.165,83.847 RGB27.3@202.282,83.964 ; RGB28.3@221.282,83.964 221.401,84.084 v1@222.7,84.084 ; v1@222.752,84.136 232.725,84.136 234.038,82.823 v1(234.227,82.823) ; v1(235.431,82.833) 240.037,82.833 241.804,82.833 v1(241.842,82.87) ; v1(238.213,40.201) 238.216,40.201 239.372,39.045 239.442,39.045 239.461,39.025 249.273,39.025 v1(249.555,39.307) ; U1.10@238.368,37.39 238.368,35.317 v1@238.379,35.306 ; 240.037,82.869 240.037,83.719 RGB29.3@240.282,83.964 ; v1@241.842,82.833 244.156,82.833 247.404,79.584 263.344,79.584 263.448,79.689 v1(263.456,79.689) ; v1(264.865,79.697) 269.871,79.697 v1(270.214,80.039) 280.191,80.039 282.829,82.677 296.198,82.677 296.742,83.221 296.742,83.514 RGB31.3@297.242,84.014 ; RGB30.3@268.782,83.964 270.14,83.964 v1(270.161,83.943)
DB2: RGB38.3 RGB39.3 RGB40.3 RGB41.3 RGB42.3 RGB43.3 RGB44.3 RGB45.3 RGB46.3 RGB47.3 RGB48.3 RGB49.3 RGB50.3 RGB51.3 RGB52.3 U1.13 | length 340.3
  Top w0.2: v1@34.882,63.811 34.886,63.814 36.016,63.814 v1(36.057,63.855) ; v1(53.976,63.855) 54.058,63.773 55.207,63.773 v1(55.209,63.771) ; v1@72.955,63.716 74.131,63.716 v1(74.151,63.736) ; v1(91.939,63.745) 91.942,63.748 v1(93.177,63.748) ; v1@110.967,63.756 112.139,63.756 v1(112.141,63.754) ; v1(129.906,63.787) 129.939,63.754 v1(131.191,63.754) ; v1@149.09,63.723 149.122,63.754 v1(150.179,63.754) ; v1(167.887,63.773) 169.018,63.773 v1(169.037,63.754) ; v1(186.805,63.754) v1(187.96,63.754) ; v1(206.002,63.767) 206.01,63.759 v1(207.171,63.759) ; v1(224.999,63.759) 226.13,63.759 226.172,63.716 v1(226.187,63.716) ; v1(238.125,63.754) 238.125,60.579 239.217,59.487 239.217,45.799 236.36,42.942 236.36,36.164 239.668,32.856 v1(239.668,29.483) ; v1(243.818,63.946) 243.901,63.946 244.055,63.792 245.199,63.792 v1(245.237,63.754) ; v1(267.675,63.787) 267.743,63.718 274.382,63.718 v1(274.948,64.284) ; v1(290.83,64.389) 290.851,64.389 291.466,63.775 v1(292.887,63.775)
  Bottom w0.2: RGB38.3@17.032,64.964 17.032,63.776 17.263,63.544 34.57,63.544 34.799,63.773 v1(34.882,63.773) ; v1(36.057,63.855) 38.362,63.855 38.444,63.773 40.665,63.773 ; RGB39.3@40.782,64.964 40.782,63.891 40.665,63.773 ; v1(53.976,63.855) 53.892,63.771 40.667,63.771 40.665,63.773 ; v1(55.209,63.771) 59.637,63.771 59.637,64.819 RGB40.3@59.782,64.964 ; 59.646,63.78 72.684,63.78 72.689,63.775 72.896,63.775 v1@72.955,63.716 ; v1(74.151,63.736) 78.43,63.736 ; RGB41.3@78.782,64.964 78.782,64.088 78.43,63.736 ; v1@91.948,63.754 v1(91.939,63.745) 91.93,63.736 78.43,63.736 ; v1(93.177,63.748) 96.978,63.748 97.058,63.827 ; RGB42.3@97.782,64.964 97.282,64.464 97.282,64.052 97.058,63.827 ; v1@110.967,63.756 97.129,63.756 97.058,63.827 ; v1(112.141,63.754) 116.665,63.754 ; RGB43.3@116.782,64.964 116.782,63.871 116.665,63.754 ; v1(129.906,63.787) 116.698,63.787 116.665,63.754 ; v1(131.191,63.754) 135.665,63.754 ; RGB44.3@135.782,64.964 135.782,63.871 135.665,63.754 ; v1@148.954,63.754 135.665,63.754 ; v1(150.179,63.754) 154.64,63.754 154.64,64.822 RGB45.3@154.782,64.964 ; 154.64,63.773 v1(167.887,63.773) ; v1(169.037,63.754) 173.586,63.754 ; RGB46.3@173.782,64.964 173.782,63.95 173.586,63.754 ; v1(186.805,63.754) 173.586,63.754 ; v1(187.96,63.754) 192.542,63.754 192.659,63.871 192.659,64.841 RGB47.3@192.782,64.964 ; 192.554,63.767 v1(206.002,63.767) ; v1(207.171,63.759) 211.782,63.759 ; RGB48.3@211.782,64.964 211.782,63.759 ; v1(224.999,63.759) 211.782,63.759 ; v1(226.187,63.716) 226.201,63.702 230.453,63.702 230.782,64.031 RGB49.3@230.782,64.964 ; 230.491,63.74 243.701,63.74 243.701,63.745 243.818,63.863 v1(243.818,63.946) ; v1(239.668,29.483) U1.13@239.668,31.19 ; v1(245.237,63.754) 249.555,63.754 ; RGB50.3@249.782,64.964 249.555,64.737 249.555,63.754 ; v1(267.675,63.787) 267.642,63.754 249.555,63.754 ; RGB51.3@273.532,64.964 273.882,64.964 274.282,64.564 274.282,64.399 274.399,64.281 274.946,64.281 v1(274.948,64.284) 275.031,64.284 275.217,64.098 290.539,64.098 v1(290.83,64.389) ; v1(292.887,63.775) 297.219,63.775 297.336,63.892 RGB52.3@297.336,65.025
  other v1: 72.955,63.736 110.967,63.754 148.972,63.742
DB3: RGB12.3 RGB59.3 RGB60.3 RGB61.3 RGB62.3 RGB63.3 RGB64.3 RGB65.3 RGB66.3 RGB67.3 RGB68.3 RGB69.3 RGB70.3 RGB71.3 U1.16 | length 317.3
  Top w0.2: v1(39.526,44.822) v1(40.766,44.822) ; v1(58.7,44.824) 59.833,44.824 59.834,44.822 v1(59.866,44.822) ; v1(77.581,44.921) 77.608,44.894 v1(79.016,44.894) ; v1(96.771,44.858) 96.822,44.909 97.889,44.909 v1(97.939,44.959) ; v1(115.501,44.923) 115.533,44.891 116.935,44.891 v1(116.967,44.858) ; v1(134.792,44.864) 134.794,44.861 136.014,44.861 v1(136.017,44.858) ; v1(153.823,44.846) v1(155.027,44.846) ; v1(172.72,44.879) 172.731,44.879 172.749,44.86 173.907,44.86 v1(173.937,44.89) ; v1(191.783,44.879) v1(192.991,44.879) ; v1(210.554,44.879) v1(211.99,44.879) ; v1(229.569,44.966) v1(230.822,44.966) ; v1(237.451,46.272) 237.451,46.176 235.077,43.801 235.077,35.656 237.666,33.067 v1(237.666,32.542) ; v1(260.241,45.058) 260.241,45.031 260.359,44.914 v1(261.703,44.914) ; v1(291.625,44.914) 292.775,44.914 v1(292.791,44.898)
  Bottom w0.2: RGB59.3@19.412,45.964 19.412,44.914 19.529,44.797 39.501,44.797 v1(39.526,44.822) ; v1(40.766,44.822) 40.795,44.794 58.67,44.794 v1(58.7,44.824) ; 45.276,44.824 45.276,45.703 RGB60.3@45.537,45.964 ; v1(59.866,44.822) 59.924,44.764 64.42,44.764 ; RGB61.3@64.537,45.964 64.537,44.881 64.42,44.764 ; v1(77.581,44.921) 74.332,44.921 73.055,46.198 72.872,46.198 72.869,46.201 70.213,46.201 70.21,46.198 70.097,46.198 68.663,44.764 64.42,44.764 ; v1(79.016,44.894) 79.052,44.858 v1(96.771,44.858) ; RGB62.3@83.537,45.964 83.566,45.935 83.566,44.891 ; v1(97.939,44.959) 98.053,44.845 102.42,44.845 102.432,44.857 ; RGB63.3@102.537,45.964 102.537,44.962 102.432,44.857 ; v1(115.501,44.923) 115.435,44.857 102.432,44.857 ; v1(116.967,44.858) 116.994,44.831 121.42,44.831 ; RGB64.3@121.537,45.964 121.42,45.847 121.42,44.831 ; v1(134.792,44.864) 134.759,44.831 121.42,44.831 ; v1(136.017,44.858) 140.41,44.858 ; RGB65.3@140.537,45.964 140.537,44.986 140.41,44.858 ; v1(153.823,44.846) 153.781,44.846 150.841,47.786 144.289,47.786 141.361,44.858 140.41,44.858 ; v1(155.027,44.846) 155.043,44.831 159.416,44.831 ; RGB66.3@159.537,45.964 159.537,44.952 159.416,44.831 ; v1(172.72,44.879) 172.672,44.831 159.416,44.831 ; v1(173.937,44.89) 173.995,44.831 178.537,44.831 178.537,44.843 ; RGB67.3@178.537,45.964 178.537,44.843 ; v1(191.783,44.879) 191.747,44.843 178.537,44.843 ; v1(192.991,44.879) 193.027,44.843 197.37,44.843 ; RGB68.3@197.537,45.964 197.612,45.889 197.612,45.085 197.37,44.843 ; v1(210.554,44.879) 210.518,44.843 197.37,44.843 ; v1(211.99,44.879) 212.038,44.831 216.154,44.831 ; RGB69.3@216.537,45.964 216.154,45.581 216.154,44.831 ; v1(229.569,44.966) 229.536,44.999 229.219,44.999 227.217,47.001 219.487,47.001 217.316,44.831 216.154,44.831 ; v1(230.822,44.966) 230.905,44.966 231.025,44.846 231.287,44.846 231.298,44.835 234.82,44.835 235.537,45.552 RGB70.3@235.537,45.964 235.652,45.85 237.028,45.85 v1(237.451,46.272) ; 237.329,46.024 259.275,46.024 v1(260.241,45.058) ; v1(237.666,32.542) 237.666,31.366 U1.16@237.696,31.336 ; v1(261.703,44.914) 261.752,44.864 266.261,44.864 ; RGB71.3@266.412,45.964 266.261,45.814 266.261,44.864 ; v1(291.625,44.914) 291.575,44.864 266.261,44.864 ; v1(292.791,44.898) 296.866,44.898 297.336,45.368 RGB12.3@297.336,46.025
DB4: RGB16.3 RGB75.3 RGB76.3 RGB77.3 RGB78.3 RGB79.3 RGB80.3 RGB81.3 RGB82.3 RGB83.3 RGB84.3 RGB85.3 RGB86.3 RGB87.3 U1.19 | length 297.2
  Top w0.2: v1(49.097,25.896) 50.277,25.896 v1(50.311,25.862) ; v1(68.149,25.91) 68.151,25.908 v1(69.342,25.908) ; v1(87.206,25.867) v1(88.314,25.866) ; v1(106.23,25.872) 106.234,25.868 107.479,25.868 v1(107.483,25.864) ; v1(125.196,25.856) v1(126.492,25.856) ; v1(144.171,25.864) 145.301,25.864 145.312,25.853 v1(145.335,25.853) ; v1@163.133,25.83 v1(164.243,25.831) ; v1(182.227,25.831) 182.231,25.826 183.511,25.826 v1(183.515,25.823) ; v1(201.159,25.847) 201.172,25.835 202.29,25.835 v1(202.302,25.823) ; v1(220.096,25.893) 220.099,25.896 v1(221.285,25.896) ; v1(235.712,25.908) v1@235.712,29.852 ; v1(246.334,25.827) 246.339,25.822 v1(247.655,25.822) ; v1(271.986,25.964) 272.044,25.906 273.246,25.906 v1(273.304,25.964) ; v1(290.499,25.773) 290.499,27.048 290.513,27.062 v1(290.513,27.09)
  Bottom w0.2: RGB75.3@24.162,26.964 24.162,26.013 24.279,25.896 v1(49.097,25.896) ; v1(50.311,25.862) 50.34,25.833 54.92,25.833 55.037,25.951 RGB76.3@55.037,26.964 ; 54.996,25.91 v1(68.149,25.91) ; v1(69.342,25.908) 69.401,25.849 69.741,25.849 69.756,25.833 73.849,25.833 ; RGB77.3@74.037,26.964 73.849,26.777 73.849,25.833 ; v1(87.206,25.867) 87.173,25.833 73.849,25.833 ; v1(88.314,25.866) 88.347,25.833 106.192,25.833 v1(106.23,25.872) ; 92.951,25.864 92.951,26.879 RGB78.3@93.037,26.964 ; v1(107.483,25.864) 107.513,25.833 111.812,25.833 ; 111.819,25.84 111.968,25.691 125.031,25.691 v1(125.196,25.856) ; 111.934,25.856 111.934,26.861 RGB79.3@112.037,26.964 ; v1(126.492,25.856) 126.515,25.833 130.735,25.833 ; RGB80.3@131.037,26.964 130.739,26.667 130.739,25.837 130.735,25.833 ; v1(144.171,25.864) 144.14,25.833 130.735,25.833 ; v1(145.335,25.853) 145.358,25.83 149.92,25.83 ; RGB81.3@150.037,26.964 150.037,25.947 149.92,25.83 ; v1(163.133,25.83) 149.92,25.83 ; v1@164.244,25.83 168.705,25.83 ; RGB82.3@169.037,26.964 168.77,26.697 168.77,25.895 168.705,25.83 ; v1@182.226,25.83 168.705,25.83 ; v1(183.515,25.823) 183.557,25.781 200.989,25.781 200.996,25.788 201.101,25.788 v1(201.159,25.847) ; 187.883,25.847 187.883,26.81 RGB83.3@188.037,26.964 ; v1(202.302,25.823) 202.344,25.781 206.756,25.781 ; RGB84.3@207.037,26.964 206.756,26.683 206.756,25.781 ; v1(220.096,25.893) 220.037,25.834 219.878,25.834 219.825,25.781 206.756,25.781 ; v1(221.285,25.896) 221.343,25.837 221.721,25.837 221.731,25.827 225.591,25.827 ; RGB85.3@226.037,26.964 225.708,26.635 225.708,25.944 225.591,25.827 ; v1(235.76,29.852) U1.19@235.76,30.894 ; v1(246.334,25.827) 225.591,25.827 ; v1(247.655,25.822) 252.335,25.822 ; RGB86.3@252.452,27.014 252.452,25.939 252.335,25.822 ; v1(271.986,25.964) 271.986,25.939 271.868,25.822 252.335,25.822 ; v1(273.304,25.964) 273.381,25.887 277.982,25.887 ; RGB87.3@278.325,27.009 277.982,26.666 277.982,25.887 ; v1(290.499,25.773) 296.918,25.773 297.336,26.191 RGB16.3@297.336,27.025 ; v1(290.513,27.09) 290.486,27.062 281.468,27.062 280.293,25.887 277.982,25.887
DB5: RGB33.3 RGB74.3 RGB92.3 RGB93.3 RGB94.3 RGB95.3 RGB99.3 RGB100.3 RGB101.3 RGB102.3 U7.20 | length 331.1
  Top w0.2: v1(32.365,6.825) 33.848,6.825 v1(33.894,6.779) ; v1(56.181,6.78) 56.215,6.746 57.395,6.746 v1(57.404,6.755) ; v1(127.536,6.777) v1(129.173,6.777) ; v1(196.351,6.695) 196.412,6.634 v1(197.573,6.634) ; v1(215.696,6.735) 215.701,6.731 v1(216.916,6.731) ; v1(234.588,6.731) 235.715,6.731 v1(235.737,6.753) ; v1(253.536,6.695) 254.875,6.695 v1(254.92,6.651) ; v1(261.541,31.503) 261.493,31.455 261.493,28.563 263.168,26.888 263.168,6.956 262.971,6.759 v1(262.971,6.685) ; v1(272.381,6.815) v1(273.834,6.815) ; v1(291.338,6.858) 291.348,6.848 v1(292.648,6.848)
  Bottom w0.2: RGB92.3@14.662,7.964 14.662,6.943 14.779,6.825 v1(32.365,6.825) ; v1(33.894,6.779) 38.275,6.779 38.407,6.911 RGB93.3@38.407,7.964 ; 38.276,6.78 v1(56.181,6.78) ; v1(57.404,6.755) 57.428,6.731 62.133,6.731 ; RGB94.3@62.152,7.964 62.133,7.945 62.133,6.731 ; v1(127.536,6.777) 127.536,6.621 127.284,6.369 84.505,6.369 81.873,9.001 79.977,9.001 77.707,6.731 62.133,6.731 ; v1(129.173,6.777) 133.132,6.777 ; RGB95.3@133.407,8.006 133.132,7.731 133.132,6.777 ; v1(196.351,6.695) 196.133,6.477 184.466,6.477 181.942,9.001 178.616,9.001 174.261,13.356 157.252,13.356 150.283,6.387 133.384,6.387 133.132,6.639 133.132,6.777 ; v1(197.573,6.634) 202.252,6.634 ; RGB33.3@202.37,7.964 202.37,6.751 202.252,6.634 ; v1(215.696,6.735) 215.595,6.634 202.252,6.634 ; v1(216.916,6.731) 221.34,6.731 ; RGB74.3@221.457,7.964 221.457,6.848 221.34,6.731 ; v1(234.588,6.731) 221.34,6.731 ; v1(235.737,6.753) 235.82,6.753 235.969,6.604 240.157,6.604 240.157,7.614 RGB99.3@240.507,7.964 ; 240.157,6.695 v1(253.536,6.695) ; v1(254.92,6.651) 259.256,6.651 ; RGB100.3@259.373,7.998 259.373,6.768 259.256,6.651 ; U7.20@261.534,32.714 261.564,32.684 261.539,32.66 261.572,32.627 261.541,32.596 261.567,32.57 261.541,32.545 v1(261.541,31.503) ; v1@262.971,6.651 263.082,6.762 272.328,6.762 v1(272.381,6.815) ; v1(262.971,6.685) 262.937,6.651 259.256,6.651 ; v1(273.834,6.815) 278.208,6.815 ; RGB101.3@278.325,8.025 278.325,6.932 278.208,6.815 ; v1(291.338,6.858) 291.295,6.815 278.208,6.815 ; v1(292.648,6.848) 297.219,6.848 297.336,6.965 RGB102.3@297.336,8.025
DCLK: U1.3 U7.3 U8.22 | length 188.3
  Top w0.2: v1(115.335,10.017) 115.882,10.564 127.093,10.564 127.945,11.416 147.662,11.416 148.98,12.733 148.98,23.083 150.776,24.879 150.776,34.745 152.637,36.607 152.637,39.062 152.621,39.078 152.621,40.48 153.504,41.363 153.526,41.363 153.626,41.463 v1(153.71,41.463) ; v1(233.818,39.507) 233.84,39.528 233.84,41.228 v1(233.861,41.25) ; v1(260.234,37.569) 260.239,37.574 260.239,40.63 v1(260.281,40.672)
  Bottom w0.2: U8.22@114.227,12.579 114.227,11.546 115.335,10.438 v1(115.335,10.017) ; v1(153.71,41.463) 153.77,41.403 202.399,41.403 202.779,41.783 203.6,41.783 204.374,41.01 217.3,41.01 218.685,39.624 233.701,39.624 v1(233.818,39.507) U1.3@233.818,37.39 ; v1(233.861,41.25) 240.278,41.25 240.647,40.881 241.856,40.881 242.087,41.113 245.472,41.113 246.085,40.5 250.037,40.5 252.93,43.393 259.106,43.393 260.281,42.219 v1(260.281,40.672) ; v1(260.234,37.569) U7.3@260.234,38.914
DG0: U1.6